# Altium PCB GolgiBotV2.02_Esp.PcbDoc
Units mm, origin at the board's own origin, x right, y up, seen from the top; angles counter-clockwise.
Board outline 152.4 x 101.6 mm, 2 copper layers (Top Layer, Bottom Layer); 18 components, 36 nets, 111 pads, 49 vias.
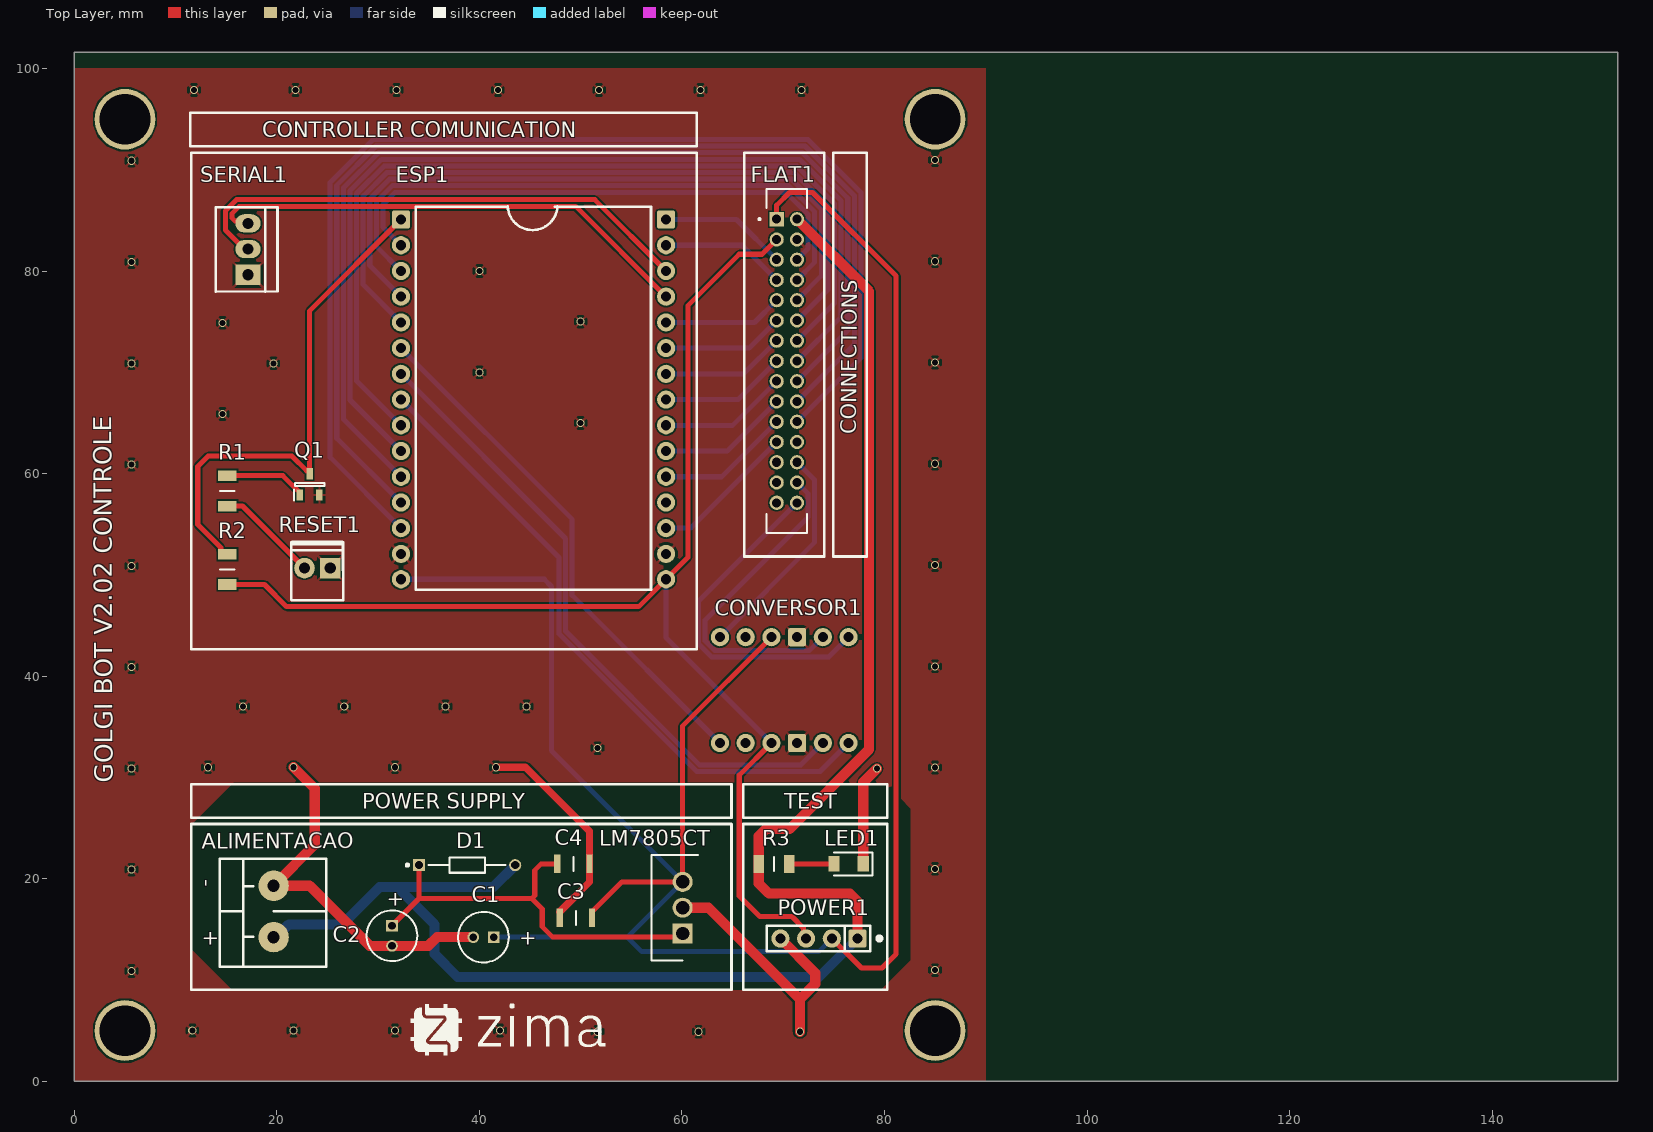
[diagram p0: Top Layer view]
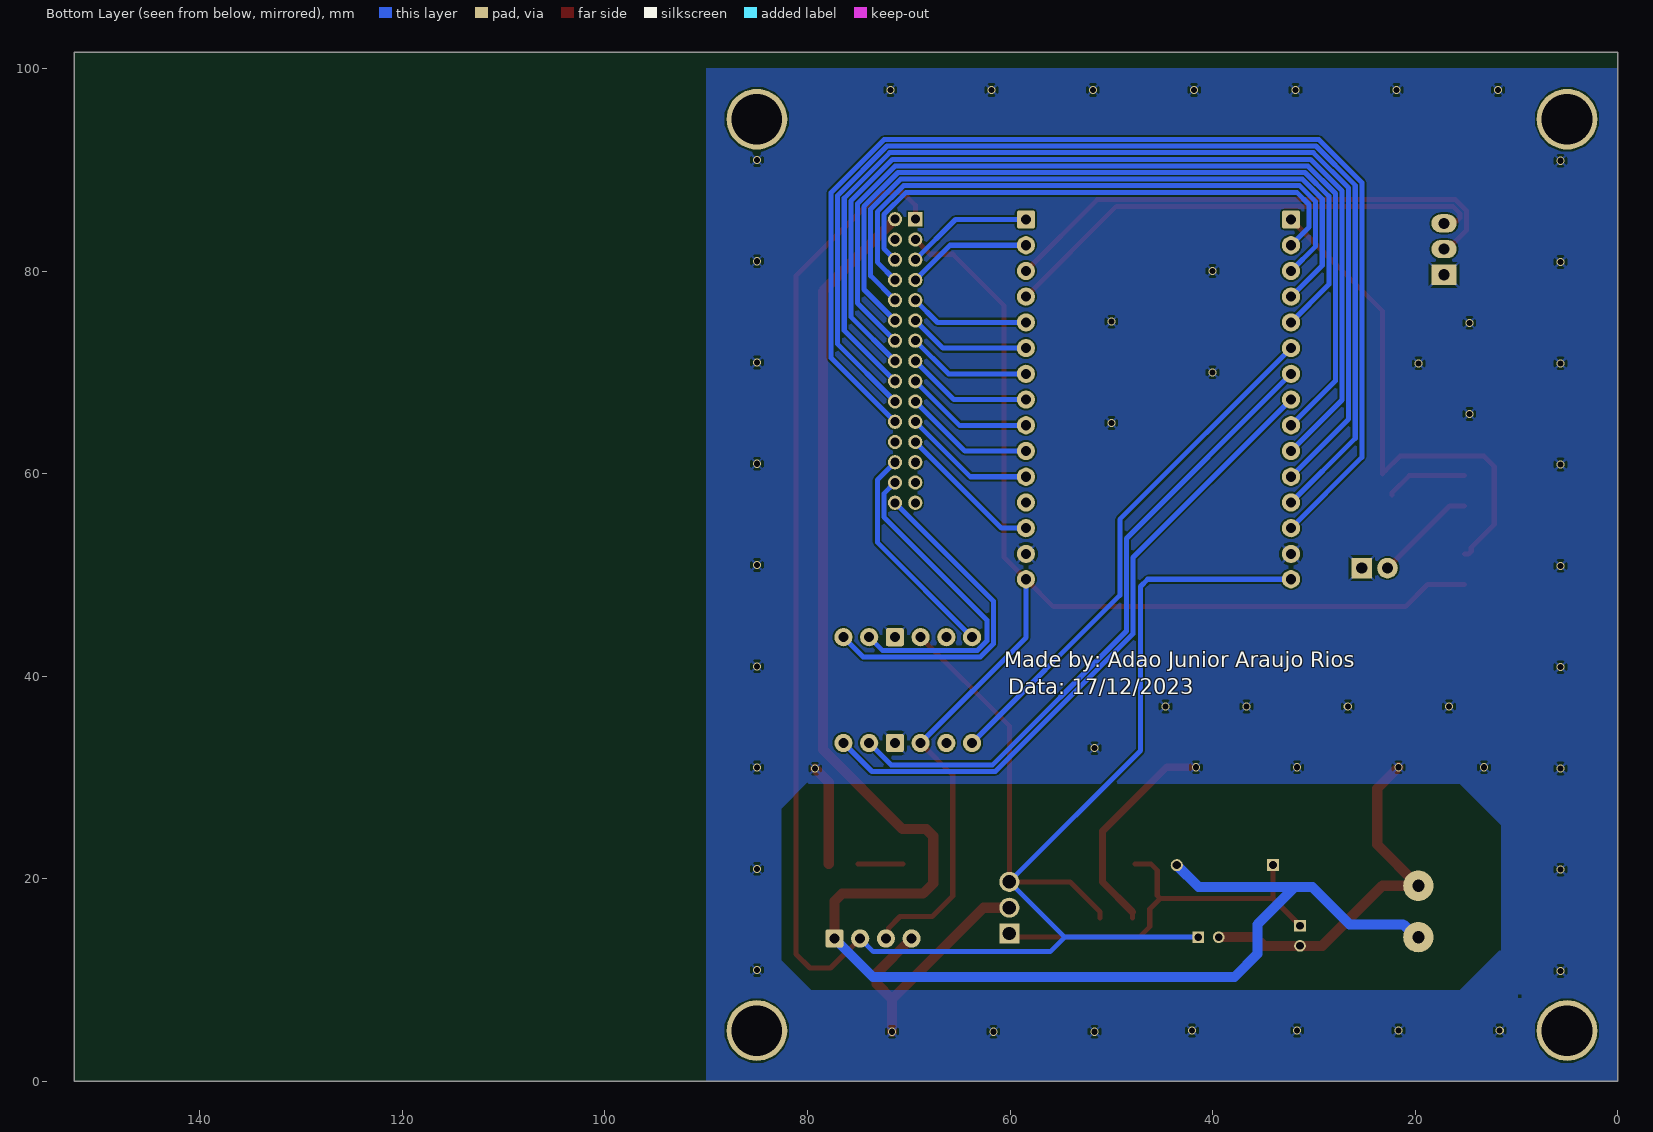
[diagram p1: Bottom Layer view, seen from below]

## Layer stack, top to bottom
Top Solder: solder mask 0.0102, Solder Resist, Dk 3.5
Top Layer: signal copper 0.0356
Dielectric 1: dielectric 0.32, FR-4, Dk 4.8
Bottom Layer: signal copper 0.0356
Bottom Solder: solder mask 0.0102, Solder Resist, Dk 3.5

## Board outline
0,0 152.4,0 152.4,101.6 0,101.6

## Design rules (kind name [scope] priority, off if disabled: settings)
Clearance [All] p1: gap=0.152 ignorepadtopadclearanceinfootprint=FALSE except(0: Arc-Hole Track-Hole SMDPad-Hole THPad-Hole Via-Hole Fill-Hole Poly-Hole Region-Hole Text-Hole)
ComponentClearance [All] p1: gap=0.1 collisioncheckmode=3 verticalgap=0.1 showdistances=FALSE
MinimumSolderMaskSliver [All] p1: minsoldermaskwidth=0.1
PolygonConnect PolygonConnect_1 [All vs InNet('GND')] p1: thpad.connectstyle=Relief thpad.reliefconductorwidth=0.254 thpad.reliefentries=4 thpad.polygonreliefangle="45 Angle" thpad.airgapwidth=0.254 smdpad.connectstyle=Relief smdpad.reliefconductorwidth=0.254 smdpad.reliefentries=4 smdpad.polygonreliefangle="90 Angle" smdpad.airgapwidth=0.254 via.connectstyle=Relief via.reliefconductorwidth=0.254 via.reliefentries=4 via.polygonreliefangle="45 Angle" via.airgapwidth=0.254
PolygonConnect [All] p2: connectstyle=Direct reliefconductorwidth=0.254 reliefentries=4 polygonreliefangle="90 Angle" airgapwidth=0.254
RoutingVias [All] p1: holewidth=0.4 width=0.8 viastyle="Through Hole" minholewidth=0.3 minwidth=0.6 maxholewidth=0.5 maxwidth=1
SilkToSilkClearance [All] p1: silktosilkclearance=0
SilkToSolderMaskClearance [IsPad] p1: minsilkscreentomaskgap=0 clearancetoexposedcopper=TRUE
SolderMaskExpansion [All] p1: expansion=0.08 istentingtop=FALSE
Width [All] p1: maxlimit=1 minlimit=0.3 preferedwidth=0.5
26 further rules are at their usual default settings.

## Components (designator, comment, footprint, x,y, rotation, side; value= is the part's Value field where it differs from the comment)
ALIMENTACAO "KRE2vias" KRE2-2vias 19.685,16.764 r270 top (schematic designator ALIMENTACAO1)
C1 "220uF" CAPPRD200W55D500H1200 41.402,14.224 r180 top
C2 "220uF" CAPPRD200W55D500H1200 31.369,15.367 r270 top
C3 "0.1uF" CAPC3216X180N 49.53,16.129 r0 top
C4 "0.1uF" CAPC3216X180N 49.276,21.463 r180 top
CONVERSOR1 "Conversor de nível logico 4 canais" "Conversor de nível lógico 4 canais" 76.629,31.976 r90 top
D1 "Diodo SD103A-TR" DIOAD950W60L350D150 34.036,21.336 r0 top
ESP1 "microcontrolador" ESP32_Desvikit_v1 32.258,85.09 r0 top value="ESP32 Desvikit V1"
FLAT1 "TCMD-15-D-20.00-01-RW" SAMTEC_TCMD-15-D-20.00-01-RW 70.358,71.12 r270 top (schematic designator CONEXOES_FLAT1)
LED1 "LED 1206" LEDC3214X78N 76.454,21.463 r180 top
LM7805CT "MC7805CT-BP" TO255P460X1020X2008-3P 60.071,14.585 r90 top
POWER1 "Testing PADS 1x4" "Testing PADS 1x4" 77.333,14.172 r180 top
Q1 "Trans BC817" SOT96P240X110-3N 23.241,58.928 r90 top
R1 "2k2" RESC3216X60N 15.113,58.293 r270 top
R2 "2k2" RESC3216X60N 15.113,50.546 r270 top
R3 "680R" RESC3216X60N 69.088,21.463 r0 top
RESET1 "KK_2.54_2vias" KK_2VIAS_180º 25.273,50.673 r180 top
SERIAL1 "KK_2.54_3vias" KK_3vias_180º 17.145,79.629 r90 top

## Footprints (in the part's own frame and the unit in brackets; to place one, negate y for a bottom-side part, rotate by r counter-clockwise, add the part's x,y. Pads: shape width x height; smd on the part's side, far side on the other; paste and mask are expansions set on the pad)
CAPC3216X180N [mm]
  rect 0.62x1.82 smd: 1(-1.6,0) 2(1.6,0)
  silkscreen extent 0,-0.7 0,0.7, body extent -1.6,-0.8 1.6,0.8, height 1.8
CAPPRD200W55D500H1200 [mm]
  rect 1.15x1.15 hole 0.75: 1(0,0)
  round 1.15 hole 0.75: 2(2,0)
  silkscreen extent -1.5,-2.5 3.5,2.5, body extent -1.75,-2.75 3.75,2.75, height 12
"Conversor de nível lógico 4 canais" [mm]
  round 1.8 hole 1: 1(1.425,12.875) 2(1.425,10.335) 3(1.425,7.795) 5(1.425,2.715) 6(1.425,0.175) 7(11.875,12.875) 8(11.875,10.335) 9(11.875,7.795) 11(11.875,2.715) 12(11.875,0.175)
  rrect25% 1.8x1.8 hole 1: 4(1.425,5.255) 10(11.875,5.255)
  body extent 0.14,-1.37 13.13,14.37, height 10.85
DIOAD950W60L350D150 [mm]
  rect 1.2x1.2 hole 0.8: 1(0,0)
  round 1.2 hole 0.8: 2(9.5,0)
  silkscreen extent -1.27,-0.75 8.55,0.75, body extent -0.3,-0.85 9.8,0.85, height 1.69
ESP32_Desvikit_v1 [mm]
  rrect25% 1.8x1.8 hole 1: 1(0,0) 30(26.175,0)
  round 1.8 hole 1: 2(0,-2.54) 3(0,-5.08) 4(0,-7.62) 5(0,-10.16) 6(0,-12.7) 7(0,-15.24) 8(0,-17.78) 9(0,-20.32) 10(0,-22.86) 11(0,-25.4) 12(0,-27.94) 13(0,-30.48) 14(0,-33.02) 15(0,-35.52) 16(26.175,-35.52) 17(26.175,-33.02) 18(26.175,-30.48) 19(26.175,-27.94) 20(26.175,-25.4) 21(26.175,-22.86) 22(26.175,-20.32) 23(26.175,-17.78) 24(26.175,-15.24) 25(26.175,-12.7) 26(26.175,-10.16) 27(26.175,-7.62) 28(26.175,-5.08) 29(26.175,-2.54)
  silkscreen extent 1.47,-36.57 24.69,1.31, body extent -1.2,-46.03 27.4,4.9, height 15.1
KK_2VIAS_180º [mil]
  rect 80x80 hole 43.31: 1(0,0)
  round 80 hole 43.31: 2(100,0)
  silkscreen extent -50,-101 151,125, body extent -61,-108 165,128, height 464
KK_3vias_180º [mm]
  rect 2x2.5 hole 1.1: 1(0,0)
  oval 1.8x2.5 hole 1.1: 2(2.54,0) 3(5.08,0)
  silkscreen extent -1.65,-2.92 6.69,3.18, body extent -1.6,-2.95 6.69,3.05, height 11.9
KRE2-2vias [mm]
  round 3 hole 1.2: 1(-2.54,0) 2(2.54,0)
  silkscreen extent -5.21,-5.33 5.46,5.21, body extent -5.13,-5.33 5.63,5.17, height 14.35
LEDC3214X78N [mm]
  rect 1.1x1.55 smd: 1(-1.45,0) 2(1.45,0)
  silkscreen extent -2.35,-1.12 1.45,1.12, body extent -1.6,0 1.6,0.68, height 0.8
RESC3216X60N [mm]
  rect 1.05x1.8 smd: 1(-1.5,0) 2(1.5,0)
  silkscreen extent 0,-0.7 0,0.7, body extent -1.58,-0.8 1.58,0.8, height 0.6
SAMTEC_TCMD-15-D-20.00-01-RW [mm]
  rect 1.398x1.398 / inner round 1.398 / far side rect 1.398x1.398 hole 0.89: 01(-14,-1)
  round 1.398 hole 0.89: 02(-14,1) 03(-12,-1) 04(-12,1) 05(-10,-1) 06(-10,1) 07(-8,-1) 08(-8,1) 09(-6,-1) 10(-6,1) 11(-4,-1) 12(-4,1) 13(-2,-1) 14(-2,1) 15(0,-1) 16(0,1) 17(2,-1) 18(2,1) 19(4,-1) 20(4,1) 21(6,-1) 22(6,1) 23(8,-1) 24(8,1) 25(10,-1) 26(10,1) 27(12,-1) 28(12,1) 29(14,-1) 30(14,1)
  silkscreen extent -17,-2.8 17,2
SOT96P240X110-3N [mm]
  rect 1.1x0.65 smd: 1(-1.05,0.96) 2(-1.05,-0.96) 3(1.05,0)
  silkscreen extent -1.6,-1.45 0.15,1.54, body extent -1.2,-1.45 1.2,1.45, height 1.1
"Testing PADS 1x4" [mm]
  rrect25% 1.8x1.8 hole 1: 1(-0.01,0.075)
  round 1.8 hole 1: 2(2.53,0.075) 3(5.07,0.075) 4(7.61,0.075)
  silkscreen extent -2.31,-1.2 8.98,1.34
TO255P460X1020X2008-3P [mm]
  rect 1.98x1.98 hole 1.32: 1(0,0)
  round 1.98 hole 1.32: 2(2.55,0) 3(5.1,0)
  silkscreen extent -2.65,-1.53 7.75,3.07, body extent -2.55,-1.53 7.65,3.07, height 19.21

## Part data
ALIMENTACAO: "Conector 2 vias", Descrição="Conector KRE 2 vias 180º", Encapsulamento="PTH - 180º", Modelo="2 vias - 180º"
C1 C2: library part "Capacitor eletrolítico D5mm", "Capacitor Polarised", Arrow Part Number=ECA-0JM221, Manufacturer_Name=Panasonic, Mouser Part Number=667-ECA-0JM221, Arrow Price/Stock=https://www.arrow.com/en/products/eca-0jm221/panasonic, Datasheet Link=http://industrial.panasonic.com/cdbs/www-data/pdf/RDF0000/ABA0000C1218.pdf, Height=12mm, Manufacturer_Part_Number=ECA-0JM221, Mouser Price/Stock=https://www.mouser.com/Search/Refine.aspx?Keyword=667-ECA-0JM221
C3 C4: library part "Capacitor Cerâmico 1206", "Capacitor", Manufacturer_Name=TDK, Manufacturer_Part_Number=C3216X5R0J226M160AA, Mouser Part Number=810-C3216X5R0J226M-6, Datasheet Link=https://product.tdk.com/info/en/catalog/datasheets/mlcc_commercial_midvoltage_en.pdf, Height=1.8mm, Mouser Price/Stock=https://www.mouser.com/Search/Refine.aspx?Keyword=810-C3216X5R0J226M-6
D1: "Schottky Diode", Arrow Part Number=SD103A-TR, Manufacturer_Name=Vishay, Mouser Part Number=625-SD103A, Arrow Price/Stock=https://www.arrow.com/en/products/sd103a-tr/vishay?region=nac, Datasheet Link=https://componentsearchengine.com/Datasheets/5/SD103A-TR.pdf, Manufacturer_Part_Number=SD103A-TR, Mouser Price/Stock=https://www.mouser.co.uk/ProductDetail/Vishay-Semiconductors/SD103A-TR?qs=RwahMLkpD2urFD%2FzZdGOBw%3D%3D
ESP1: library part "ESP32 Desvikit v1", "microcontrolador com moculo bluethoth e wifi"
FLAT1: "TCMD Series 2.00 mm IDC Ribbon Cable Assembly, Terminal", Package=None, Check_prices=https://www.snapeda.com/parts/TCMD-15-D-20.00-01-RW/Samtec/view-part/?ref=eda, MF=Samtec, MP=TCMD-15-D-20.00-01-RW, SnapEDA_Link=https://www.snapeda.com/parts/TCMD-15-D-20.00-01-RW/Samtec/view-part/?ref=snap
LED1: "LED", Manufacturer_Name="Wurth Elektronik", Manufacturer_Part_Number=150120BS75000, Mouser Part Number=710-150120BS75000, Datasheet Link=https://katalog.we-online.de/led/datasheet/150120BS75000.pdf, Height=0.78mm, Mouser Price/Stock=https://www.mouser.co.uk/ProductDetail/Wurth-Elektronik/150120BS75000?qs=LlUlMxKIyB1WGHUNBglvng%3D%3D
LM7805CT: "Integrated Circuit", Manufacturer_Name="Micro Commercial Components (MCC)", Mouser Part Number=833-MC7805CT-BP, Arrow Part Number=MC7805CT-BP, Arrow Price/Stock=https://www.arrow.com/en/products/mc7805ct-bp/micro-commercial-components, Datasheet Link=https://componentsearchengine.com/Datasheets/2/MC7805CT-BP.pdf, Height=4.82mm, Manufacturer_Part_Number=MC7805CT-BP, Mouser Price/Stock=https://www.mouser.co.uk/ProductDetail/Micro-Commercial-Components-MCC/MC7805CT-BP?qs=SdqRYZZ9IxChYPR4%2FIgmYA%3D%3D
POWER1: "Headers & Wire Housings 40Pin 2mm Spacing Single Row Hdrs, 5pc", Manufacturer=Cromax, Manufacturer Part Number=-, Accessory Type=-, Brand=Cromax, Category="Headers & Wire Housings", ComponentLink1Description=-, ComponentLink1URL=-, Contact Gender="Pin (Female)", Contact Plating=Gold, Contact Type=-, Minimum Order Quantity=1, Mounting Angle=Vertical, Mounting Style="Straight Pin", Number of Positions="40 Position", Number of Rows="1 Row", Pitch="2 mm", Pricing 1="1=1.60, 2=0.80 (BRL)", Product=Headers, Product Category=Accessories, Reeling=False, RoHS="RoHS Compliant", RoHS - Mouser=Y, Row Spacing=-, Stock 1=14, Supplier 1=-, Supplier Part Number 1=-, Termination Style="Through Hole", Type=Breakaway
Q1: "Transistor BJT NPN BC817-25-7-F", Arrow Part Number=BC817-25-7-F, Manufacturer_Name="Diodes Inc.", Mouser Part Number=621-BC817-25-7-F, Arrow Price/Stock=https://www.arrow.com/en/products/bc817-25-7-f/diodes-incorporated, Datasheet Link=https://www.diodes.com/assets/Datasheets/ds11107.pdf, Height=1.1mm, Manufacturer_Part_Number=BC817-25-7-F, Mouser Price/Stock=https://www.mouser.co.uk/ProductDetail/Diodes-Incorporated/BC817-25-7-F?qs=rGAXPo9uwV0jK0EyLZnqOw%3D%3D
R1 R2 R3: library part "Resistor 1206", "Resistor", Arrow Part Number=CRCW12064K70FKEA, Manufacturer_Name=Vishay, Mouser Part Number=71-CRCW1206-4.7K-E3, Arrow Price/Stock=https://www.arrow.com/en/products/crcw12064k70fkea/vishay, Datasheet Link=http://docs-emea.rs-online.com/webdocs/13ec/0900766b813ecc08.pdf, Height=0.6mm, Manufacturer_Part_Number=CRCW12064K70FKEA, Mouser Price/Stock=https://www.mouser.co.uk/ProductDetail/Vishay-Dale/CRCW12064K70FKEA?qs=1vm4qhDHCvlKJmatsKzyFQ%3D%3D
RESET1: "Conector KK 2.54mm 2 vias", Descrição="Conector KK 3 vias com passo 2.54mm", Encapsulamento="PTH - 180º", Modelo="2 vias - 180º", Valor="KK 2 vias 180º"
SERIAL1: "Conector KK 2.54mm 3 vias", Descrição="Conector KK 3 vias com passo 2.54mm", Encapsulamento="PTH - 180º", Modelo="3 vias - 180º", Valor="KK 3 vias 180º"

## Free pads (board coordinates)
  round 6 hole 5: 2(5,5) 2(5,95) 2(85,5) 2(85,95)

## Via types
v1: diameter 0.8, hole 0.6, Top Layer to Bottom Layer, 49 vias

## Nets (pads, with @x,y where several pads share a name; then routed paths per layer and width w, separated by ;. In a path a pad name is that pad's centre, name@x,y a point inside that pad or via, vN(x,y) a via of type N, cw(c..) or ccw(c..) an arc to the next point about the centre after c; other vN are vias at no path point)
+3V3: CONVERSOR1.3 ESP1.16 FLAT1.03 POWER1.3 R2.2 | length 130.4
  Top Layer w0.5: R2.2 18.772,49.046 20.955,46.863 55.726,46.863 ESP1.16 60.579,51.716 60.579,76.581 65.659,81.661 67.899,81.661 FLAT1.03 ; CONVERSOR1.3 65.659,30.226 65.659,18.288 67.691,16.256 70.866,16.256 72.014,15.108 72.014,14.346 POWER1.3
  Bottom Layer w0.5: ESP1.16 58.433,43.802 CONVERSOR1.3
+5: C1.1 C3.2 CONVERSOR1.9 ESP1.15 FLAT1.01 LM7805CT.3 POWER1.2 | length 222.7
  Top Layer w0.5: C3.2 51.13,16.729 54.086,19.685 LM7805CT.3 60.071,35.088 CONVERSOR1.9 ; FLAT1.01 69.358,86.503 70.612,87.757 72.898,87.757 81.153,79.502 81.153,12.573 79.756,11.176 77.724,11.176 POWER1.2
  Bottom Layer w0.5: ESP1.15 46.403,49.57 47.117,48.856 47.117,32.639 LM7805CT.3 54.61,14.224 ; C1.1 54.61,14.224 ; POWER1.2 73.501,12.795 56.039,12.795 54.61,14.224
+12: ALIMENTACAO.2 D1.2 FLAT1.02 POWER1.1 R3.1 | length 167.8
  Top Layer w1: FLAT1.02 78.486,77.992 78.486,32.766 70.612,24.892 68.277,24.892 67.588,24.203 R3.1 67.588,19.534 68.58,18.542 76.581,18.542 77.343,17.78 POWER1.1
  Bottom Layer w0.5: ALIMENTACAO.2 ALIMENTACAO.2@19.913,14.224
  Bottom Layer w1: ALIMENTACAO.2@19.913,14.224 21.183,15.494 26.479,15.494 30.162,19.177 31.877,19.177 ; D1.2 41.377,19.177 31.877,19.177 ; POWER1.1 73.533,10.287 37.846,10.287 35.56,12.573 35.56,15.494 31.877,19.177
atuador_l: CONVERSOR1.6 ESP1.8 | length 65
  Bottom Layer w0.5: ESP1.8 47.861,51.707 47.861,44.181 61.452,30.59 73.643,30.59 CONVERSOR1.6
atuador_r: CONVERSOR1.5 ESP1.7 | length 63.9
  Bottom Layer w0.5: ESP1.7 48.513,53.595 48.513,44.451 61.722,31.242 71.755,31.242 CONVERSOR1.5
bomba: CONVERSOR1.1 ESP1.6 | length 52
  Bottom Layer w0.5: ESP1.6 49.165,55.483 49.165,47.99 CONVERSOR1.1
en: ESP1.1 Q1.3 R2.1 | length 51
  Top Layer w0.5: R2.1 14.738,52.046 14.463,52.321 14.463,52.696 12.192,54.967 12.192,60.706 13.208,61.722 21.497,61.722 22.941,60.278 23.166,60.278 Q1.3@23.241,60.203 ; Q1.3 Q1.3@23.241,60.203 ; ESP1.1 23.241,76.073 Q1.3@23.241,60.203
encoder_a_x_master: ESP1.13 FLAT1.22 | length 118.6
  Bottom Layer w0.5: ESP1.13 25.264,61.604 25.264,88.736 29.518,92.99 72.422,92.99 77.675,87.737 77.675,71.437 FLAT1.22
encoder_a_x_slave: ESP1.29 FLAT1.07 | length 12.3
  Bottom Layer w0.5: ESP1.29 65.928,82.55 FLAT1.07
encoder_a_z: ESP1.25 FLAT1.11 | length 12.1
  Bottom Layer w0.5: ESP1.25 66.628,72.39 FLAT1.11
encoder_b_x_master: ESP1.18 FLAT1.23 | length 14.4
  Bottom Layer w0.5: ESP1.18 60.848,54.61 FLAT1.23
encoder_b_x_slave: ESP1.30 FLAT1.05 | length 12.6
  Bottom Layer w0.5: ESP1.30 65.388,85.09 FLAT1.05
encoder_b_z: ESP1.26 FLAT1.09 | length 11.8
  Bottom Layer w0.5: ESP1.26 67.168,74.93 FLAT1.09
endstop_l_x_master: ESP1.2 FLAT1.06 | length 53.1
  Bottom Layer w0.5: ESP1.2 30.48,84.328 30.48,86.575 31.679,87.774 70.261,87.774 72.459,85.576 72.459,82.221 FLAT1.06
endstop_l_x_slave: ESP1.20 FLAT1.21 | length 13.2
  Bottom Layer w0.5: ESP1.20 63.928,59.69 FLAT1.21
endstop_l_z: ESP1.4 FLAT1.10 | length 67.5
  Bottom Layer w0.5: ESP1.4 29.176,80.552 29.176,87.115 31.139,89.078 70.801,89.078 73.763,86.116 73.763,79.525 FLAT1.10
endstop_r_x_master: ESP1.3 FLAT1.08 | length 60.3
  Bottom Layer w0.5: ESP1.3 29.828,82.44 29.828,86.845 31.409,88.426 70.531,88.426 73.111,85.846 73.111,80.873 FLAT1.08
endstop_r_x_slave: ESP1.23 FLAT1.15 | length 12.5
  Bottom Layer w0.5: ESP1.23 65.548,67.31 FLAT1.15
endstop_r_z: ESP1.5 FLAT1.12 | length 74.8
  Bottom Layer w0.5: ESP1.5 28.524,78.664 28.524,87.385 30.869,89.73 71.071,89.73 74.415,86.386 74.415,78.177 FLAT1.12
GND: ALIMENTACAO.1 C1.2 C2.2 C3.1 C4.1 CONVERSOR1.4 CONVERSOR1.10 ESP1.14 ESP1.17 FLAT1.04 LED1.1 LM7805CT.2 POWER1.4 Q1.2 RESET1.1 SERIAL1.1 | length 94.9
  Top Layer w0.5: C3.1 C3.1@47.93,16.729
  Top Layer w0.7: v1(41.651,31) 44.565,31 50.876,24.689 C4.1 50.876,19.675 C3.1@47.93,16.729
  Top Layer w1: v1(21.651,31) 23.749,28.902 23.749,23.368 ALIMENTACAO.1 23.241,19.304 29.178,13.367 C2.2 34.957,13.367 35.814,14.224 C1.2 ; LM7805CT.2 62.621,17.135 71.651,8.105 ; POWER1.4 73.158,10.662 73.158,9.612 71.651,8.105 ; v1(71.651,4.889) 71.651,8.105 ; LED1.1 77.904,29.517 v1(79.248,30.861)
  other v1: 51.651,4.889 61.651,4.889 11.651,5 21.651,5 31.651,5 42.037,5 5.651,10.889 85,10.97 5.651,20.889 85,20.97 5.651,30.889 85,30.97 13.208,31 31.651,31 51.651,32.889 16.651,37 26.651,37 36.651,37 44.651,37 5.651,40.889 85,40.97 5.651,50.889 85,50.97 5.651,60.889 85,60.97 50,65 14.651,65.889 40,70 5.651,70.889 19.651,70.889 85,70.97 14.651,74.889 50,75 40,80 5.651,80.889 85,80.97 5.651,90.889 85,90.97 11.825,97.889 21.825,97.889 31.825,97.889 41.825,97.889 51.825,97.889 61.825,97.889 71.825,97.889
HV1: CONVERSOR1.7 FLAT1.26 | length 21.9
  Bottom Layer w0.5: CONVERSOR1.7 73.111,53.208 73.111,59.367 FLAT1.26
HV3: CONVERSOR1.11 FLAT1.28 | length 32.9
  Bottom Layer w0.5: FLAT1.28 72.459,58.019 72.459,55.703 62.296,45.54 62.296,43.467 63.215,42.549 72.612,42.549 CONVERSOR1.11
HV4: CONVERSOR1.12 FLAT1.30 | length 34.1
  Bottom Layer w0.5: FLAT1.30 61.644,47.406 61.644,43.197 62.945,41.897 74.5,41.897 CONVERSOR1.12
motor_l_x_master: ESP1.10 FLAT1.16 | length 96.9
  Bottom Layer w0.5: ESP1.10 27.22,67.268 27.22,87.925 30.329,91.034 71.611,91.034 75.719,86.926 75.719,75.481 FLAT1.16
motor_l_x_slave: ESP1.12 FLAT1.20 | length 111.4
  Bottom Layer w0.5: ESP1.12 25.916,63.492 25.916,88.466 29.788,92.338 72.152,92.338 77.023,87.467 77.023,72.785 FLAT1.20
motor_l_z: ESP1.22 FLAT1.17 | length 12.7
  Bottom Layer w0.5: ESP1.22 65.008,64.77 FLAT1.17
motor_r_x_master: ESP1.9 FLAT1.14 | length 89.6
  Bottom Layer w0.5: ESP1.9 27.872,69.156 27.872,87.655 30.599,90.382 71.341,90.382 75.067,86.656 75.067,76.829 FLAT1.14
motor_r_x_slave: ESP1.21 FLAT1.19 | length 13
  Bottom Layer w0.5: ESP1.21 64.468,62.23 FLAT1.19
motor_r_z: ESP1.24 FLAT1.13 | length 12.3
  Bottom Layer w0.5: ESP1.24 66.088,69.85 FLAT1.13
NetC2_1: C2.1 C4.2 D1.1 LM7805CT.1 | length 41.2
  Top Layer w0.5: C2.1 34.036,18.034 ; D1.1 34.036,18.034 ; C4.2 46.101,21.463 45.466,20.828 45.466,18.327 45.173,18.034 ; LM7805CT.1 59.71,14.224 47.244,14.224 46.209,15.259 46.209,16.999 45.173,18.034 ; 34.036,18.034 45.173,18.034
NetLED1_2: LED1.2 R3.2 | length 4.4
  Top Layer w0.5: R3.2 LED1.2
NetQ1_1: Q1.1 R1.1 | length 8.1
  Top Layer w0.5: R1.1 20.591,59.793 22.281,58.103 Q1.1
NetR1_2: R1.2 RESET1.2 | length 10.2
  Top Layer w0.5: R1.2 16.613,56.793 RESET1.2
RX: ESP1.27 SERIAL1.3 | length 49.1
  Top Layer w0.5: SERIAL1.3 16.896,84.958 15.854,84.958 15.561,85.251 15.561,85.665 16.288,86.392 49.511,86.392 ESP1.27
"sensor de pressao": ESP1.11 FLAT1.18 | length 104.1
  Bottom Layer w0.5: ESP1.11 26.568,65.38 26.568,88.195 30.059,91.686 71.881,91.686 76.371,87.196 76.371,74.133 FLAT1.18
TX: ESP1.28 SERIAL1.2 | length 51.8
  Top Layer w0.5: SERIAL1.2 16.795,82.169 14.909,84.055 14.909,85.935 16.018,87.044 51.399,87.044 ESP1.28
pads on no net: CONVERSOR1.2 CONVERSOR1.8 ESP1.19 FLAT1.24 FLAT1.25 FLAT1.27 FLAT1.29

## Polygon pours and split planes (outlines as drawn)
GND on Top Layer "GND_L01_P000" (solid, pour order 0): 0,0 0,100 90,100 90,0
GND on Bottom Layer "GND_L02_P001" (solid, pour order 1): 0,0 0,100 90,100 90,0

## Other copper
Top Layer:
  pour cut-out: 11.557,13.081 15.494,9.144 15.494,9.017 79.629,9.017 82.55,11.938 82.55,26.924 80.01,29.464 15.748,29.464 11.557,25.273
Bottom Layer:
  pour cut-out: 11.557,12.954 11.684,12.954 15.621,9.017 79.629,9.017 82.55,11.938 82.55,26.924 80.01,29.464 79.883,29.337 15.621,29.337 11.557,25.273

## Silkscreen, mask and mechanical layers (free items; w line width, h text height)
Top Overlay:
  drawing of 41 lines, arcs and shapes, not listed
  text "CONTROLLER COMUNICATION" at 18.542,93.218 h1.52
  text "CONNECTIONS" at 77.218,63.883 h1.52 r89.6
  text "GOLGI BOT V2.02 CONTROLE" at 3.809,29.463 h1.8 r90.22
  text "POWER SUPPLY" at 28.448,26.924 h1.52
  text "TEST" at 70.104,26.924 h1.52
  text "-" at 12.445,19.941 h1.52 r269.77
  text "+" at 30.834,17.338 h1.52
  text "+" at 12.573,13.462 h1.52
  text "+" at 43.942,13.462 h1.52
Bottom Overlay:
  text "Made by: Adao Junior Araujo Rios" at 60.579,40.894 h1.52
  text "Data: 17/12/2023" at 60.198,38.227 h1.52